# EAGLE board panelizado (EAGLE 6.5.0)
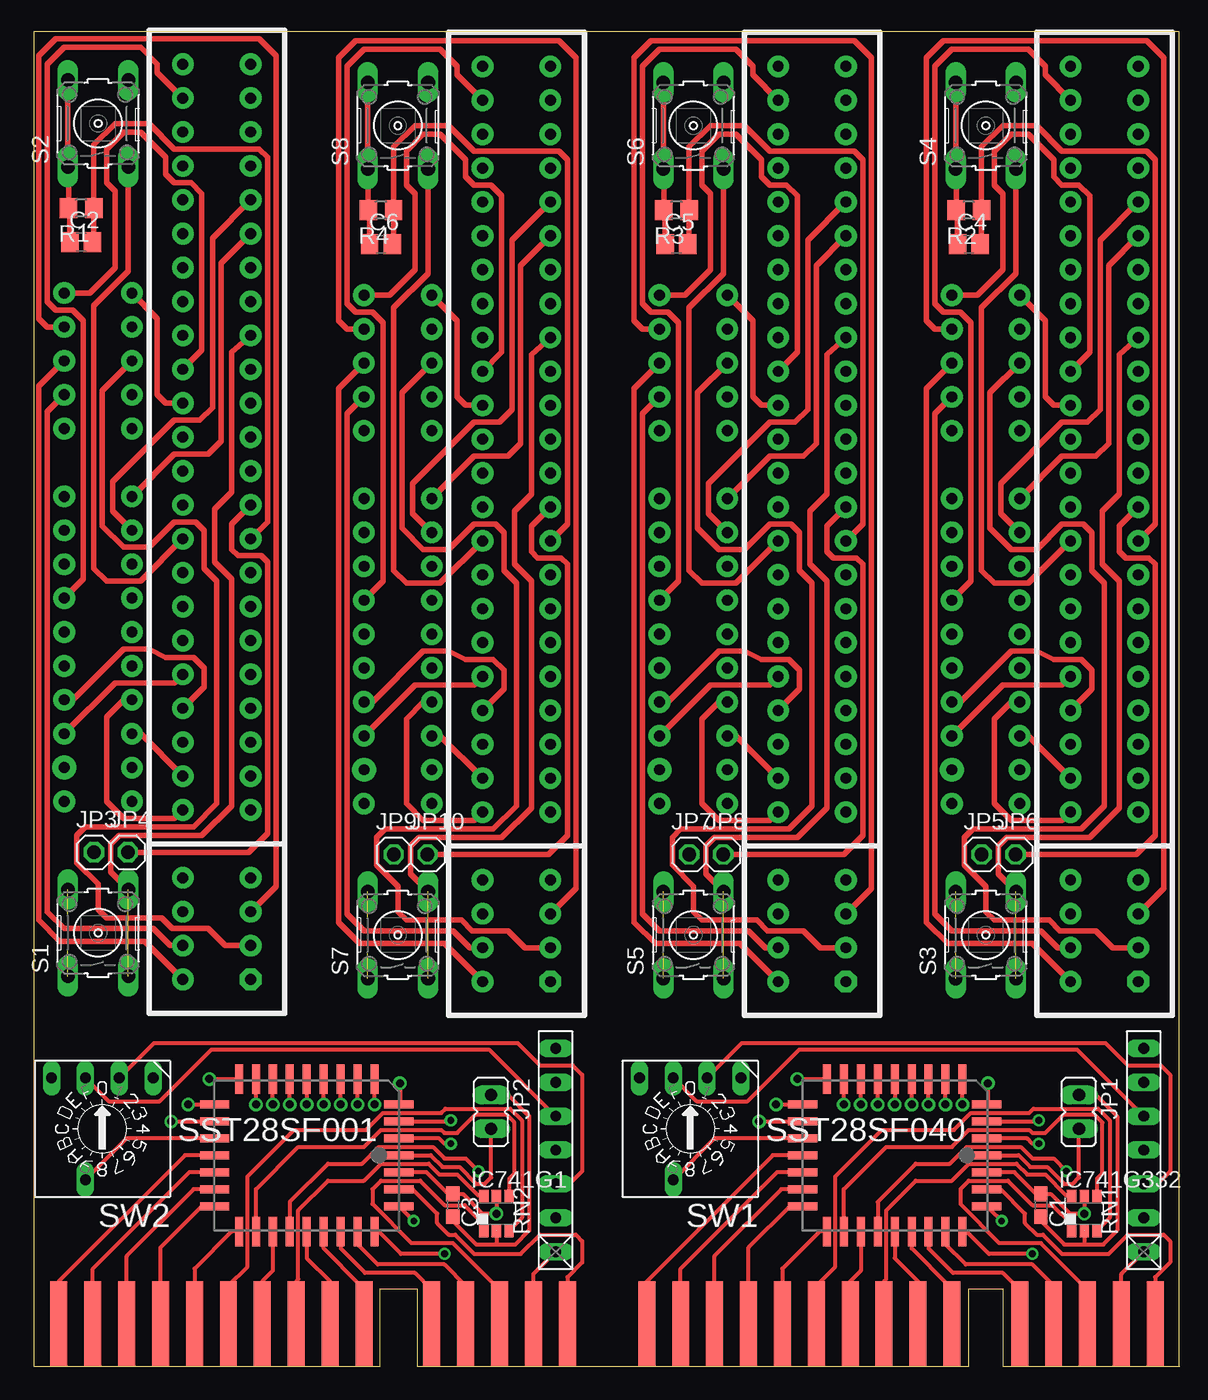
[diagram p0: board, top side]
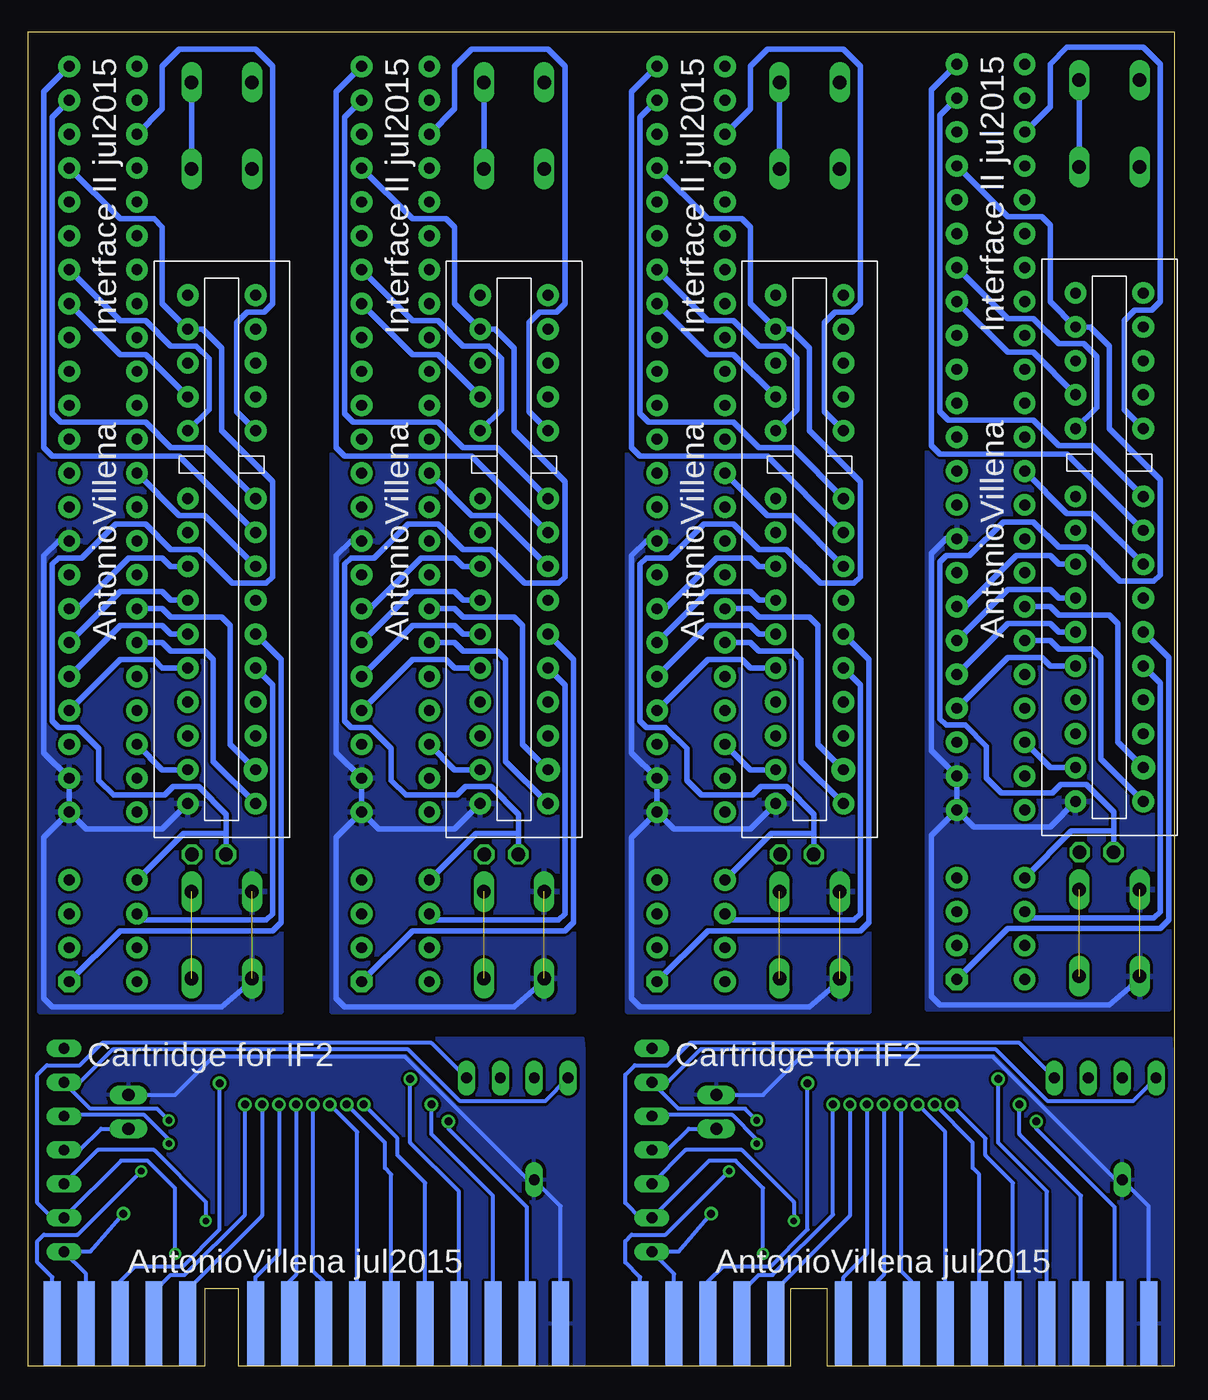
[diagram p1: board, bottom side, seen from below]

No outline drawn. Coordinates in mm, seen from the top.
Copper layers (1*16): Top 0.035mm / dielectric 1.5mm / Bottom 0.035mm
Design rules "default": minimum track width 10mil, minimum drill 24mil, track to track 8mil, track to pad 8mil, pad to pad 8mil, via to via 8mil, smd to smd 8mil, copper to edge 40mil, drill to drill 8mil, minimum pad ring 10mil, minimum via ring 8mil, stop-mask expansion 4mil, vias tented up to drill 0mil, thermal gap 10mil
Milling: 13 lines

## Footprints (pad centres in the part's own frame; a part is rotated, then mirrored left to right if it is on the bottom)
C0603 = smd 1.1 x 1: 1 -0.85,0; 2 0.85,0
C0805 = smd 1.3 x 1.5: 1 -0.85,0; 2 0.85,0
DBV_R-PDSO-G6 = smd 0.69 x 0.99: 1 -0.95,-1.29; 2 0,-1.29; 3 0.95,-1.29; 4 0.95,1.3; 5 0,1.3; 6 -0.95,1.3
JP1 = drill 0.914 long: 1 0,-1.27; 2 0,1.27
1X01 = drill 1.016 octagon: 1 0,0
R0805 = smd 1.3 x 1.5: 1 -0.95,0; 2 0.95,0
RN-7 = drill 0.813 long: 1 -7.62,0; 2 -5.08,0; 3 -2.54,0; 4 0,0; 5 2.54,0; 6 5.08,0; 7 7.62,0
B3F-10XX = drill 1.016 long: 1 -3.251,2.261; 2 3.251,2.261; 3 -3.251,-2.261; 4 3.251,-2.261
PLCC32R = smd 0.6 x 2.2: 1 0,6.9; 2 -1.27,6.9; 3 -2.54,6.9; 4 -3.81,6.9; 14 -3.81,-6.9; 15 -2.54,-6.9; 16 -1.27,-6.9; 17 0,-6.9; 18 1.27,-6.9; 19 2.54,-6.9; 20 3.81,-6.9; 30 3.81,6.9; 31 2.54,6.9; 32 1.27,6.9 | smd 2.2 x 0.6: 5 -5.7,5.08; 6 -5.7,3.81; 7 -5.7,2.54; 8 -5.7,1.27; 9 -5.7,0; 10 -5.7,-1.27; 11 -5.7,-2.54; 12 -5.7,-3.81; 13 -5.7,-5.08; 21 5.7,-5.08; 22 5.7,-3.81; 23 5.7,-2.54; 24 5.7,-1.27; 25 5.7,0; 26 5.7,1.27; 27 5.7,2.54; 28 5.7,3.81; 29 5.7,5.08
SW-C16 = drill 0.813 long: 1 -3.81,-3.81; 2 -1.27,-3.81; 4 1.27,-3.81; 8 3.81,-3.81; C 1.27,3.81
BUS_CARTUCHO_IF2 = smd 1.27 x 6.35 bottom: A0 -27.305,3.175; A1 -24.765,3.175; A2 -22.225,3.175; A3 -19.685,3.175; A4 -17.145,3.175; A5 -14.605,3.175; A6 -9.525,3.175; A7 -6.985,3.175; A12 -4.445,3.175; D0 -29.845,3.175; D1 -32.385,3.175; D2 -34.925,3.175; GND -37.465,3.175; RD 0.635,3.175; ROMCS -1.905,3.175 | smd 1.27 x 6.35: A8 -9.525,3.175; A9 -14.605,3.175; A10 -22.225,3.175; A11 -17.145,3.175; A13 -6.985,3.175; A14 -24.765,3.175; A15 -4.445,3.175; D3 -37.465,3.175; D4 -34.925,3.175; D5 -32.385,3.175; D6 -29.845,3.175; D7 -27.305,3.175; MREQ -19.685,3.175; VCC -1.905,3.175; WR 0.635,3.175
ZX_CARTRIDGE = drill 0.813 pad 1.626: +5V 17.78,-2.54; A0 -7.62,2.54; A1 -5.08,2.54; A2 -2.54,2.54; A3 0,2.54; A4 2.54,2.54; A5 5.08,2.54; A6 10.16,2.54; A7 12.7,2.54; A8 10.16,-2.54; A9 5.08,-2.54; A10 -2.54,-2.54; A11 2.54,-2.54; A12 15.24,2.54; A13 12.7,-2.54; A14 -5.08,-2.54; A15 15.24,-2.54; D0 -10.16,2.54; D1 -12.7,2.54; D2 -15.24,2.54; D3 -17.78,-2.54; D5 -12.7,-2.54; D6 -10.16,-2.54; D7 -7.62,-2.54; GND -17.78,2.54; MREQ 0,-2.54; RD 20.32,2.54; ROMCS 17.78,2.54; WR 20.32,-2.54 | drill 0.813 pad 1.788: D4 -15.24,-2.54
2X28_SPE = drill 0.813 pad 1.626 octagon: A1 0,-5.08 | drill 0.813 pad 1.626: A2 2.54,-5.08; A3 5.08,-5.08; A4 7.62,-5.08; A6 12.7,-5.08; A7 15.24,-5.08; A8 17.78,-5.08; A9 20.32,-5.08; A10 22.86,-5.08; A11 25.4,-5.08; A12 27.94,-5.08; A13 30.48,-5.08; A14 33.02,-5.08; A15 35.56,-5.08; A16 38.1,-5.08; A17 40.64,-5.08; A18 43.18,-5.08; A19 45.72,-5.08; A20 48.26,-5.08; A21 50.8,-5.08; A22 53.34,-5.08; A23 55.88,-5.08; A24 58.42,-5.08; A25 60.96,-5.08; A26 63.5,-5.08; A27 66.04,-5.08; A28 68.58,-5.08; B1 0,0; B2 2.54,0; B3 5.08,0; B4 7.62,0; B6 12.7,0; B7 15.24,0; B8 17.78,0; B9 20.32,0; B10 22.86,0; B11 25.4,0; B12 27.94,0; B13 30.48,0; B14 33.02,0; B15 35.56,0; B16 38.1,0; B17 40.64,0; B18 43.18,0; B19 45.72,0; B20 48.26,0; B21 50.8,0; B22 53.34,0; B23 55.88,0; B24 58.42,0; B25 60.96,0; B26 63.5,0; B27 66.04,0; B28 68.58,0

## Placement (x,y rotation side)
C1  [C0603]  75.49,12.06 270 top
C2  4.7uF  [C0805]  3.57,84.22 0 top
C3  [C0603]  31.43,12.06 270 top
C4  4.7uF  [C0805]  70.09,84.06 0 top
C5  4.7uF  [C0805]  48.18,84.06 0 top
C6  4.7uF  [C0805]  26.04,84.06 0 top
IC741G1  [DBV_R-PDSO-G6]  34.69,11.43 0 top
IC741G332  [DBV_R-PDSO-G6]  78.74,11.43 0 top
JP1  [JP1]  78.34,19.05 180 top
JP2  [JP1]  34.29,19.05 180 top
JP3  [1X01]  4.52,38.5 0 top
JP4  [1X01]  7.06,38.5 0 top
JP5  [1X01]  71.04,38.34 0 top
JP6  [1X01]  73.58,38.34 0 top
JP7  [1X01]  49.13,38.34 0 top
JP8  [1X01]  51.67,38.34 0 top
JP9  [1X01]  26.99,38.34 0 top
JP10  [1X01]  29.53,38.34 0 top
R1  1K  [R0805]  3.57,86.76 180 top
R2  1K  [R0805]  70.09,86.6 180 top
R3  1K  [R0805]  48.18,86.6 180 top
R4  1K  [R0805]  26.04,86.6 180 top
RN1  [RN-7]  83.19,16.19 90 top
RN2  [RN-7]  39.13,16.19 90 top
S1  [B3F-10XX]  4.84,32.46 90 top
S2  [B3F-10XX]  4.84,93.11 90 top
S3  [B3F-10XX]  71.36,32.31 90 top
S4  [B3F-10XX]  71.36,92.95 90 top
S5  [B3F-10XX]  49.45,32.31 90 top
S6  [B3F-10XX]  49.45,92.95 90 top
S7  [B3F-10XX]  27.3,32.31 90 top
S8  [B3F-10XX]  27.3,92.95 90 top
SST28SF001  [PLCC32R]  20.48,15.8 270 top
SST28SF040  [PLCC32R]  64.53,15.8 270 top
SW1  [SW-C16]  49.21,17.78 180 top
SW2  [SW-C16]  5.16,17.78 180 top
U$1  IF2BUS  [BUS_CARTUCHO_IF2]  83.42,0 0 top
U$2  ZX_CARTRIDGE  [ZX_CARTRIDGE]  4.84,60.09 90 bottom
U$3  [2X28_SPE]  11.19,28.97 90 top
U$4  IF2BUS  [BUS_CARTUCHO_IF2]  39.37,0 0 top
U$5  [2X28_SPE]  77.71,28.81 90 top
U$6  ZX_CARTRIDGE  [ZX_CARTRIDGE]  71.36,59.93 90 bottom
U$7  [2X28_SPE]  55.8,28.81 90 top
U$8  ZX_CARTRIDGE  [ZX_CARTRIDGE]  49.45,59.93 90 bottom
U$9  [2X28_SPE]  33.66,28.81 90 top
U$10  ZX_CARTRIDGE  [ZX_CARTRIDGE]  27.3,59.93 90 bottom

## Library data of the parts
C1 C3 R1-R4 = rcl
C2 C4-C6 = resistor
IC741G1 IC741G332 = 74xx-little-de
JP1 JP2 = jumper
JP3-JP10 = pinhead
RN1 RN2 = resistor-net; OC_FARNELL: unknown; OC_NEWARK: unknown
S1-S8 = switch-omron; MPN: B3F-1000; OC_FARNELL: 176432; OC_NEWARK: 36M3542
SST28SF001 SST28SF040 = memory
SW1 SW2 = special
U$1 U$4 = SPECTRUM
U$2 U$6 U$8 U$10 = 8Bit_Parts
U$3 U$5 U$7 U$9 = zx_edge

## Nets
9V: U$3.A4
9V1: U$5.A4
9V2: U$7.A4
9V3: U$9.A4
+12V: U$3.B22
+12V1: U$5.B22
+12V2: U$7.B22
+12V3: U$9.B22
-5V: U$3.B20
-5V1: U$5.B20
-5V2: U$7.B20
-5V3: U$9.B20
-12V: U$3.B23
-12V1: U$5.B23
-12V2: U$7.B23
-12V3: U$9.B23
A0: SST28SF040.12 U$1.A0
A1: SST28SF040.11 U$1.A1
A2: SST28SF040.10 U$1.A2
A3: SST28SF040.9 U$1.A3
A4: SST28SF040.8 U$1.A4
A5: SST28SF040.7 U$1.A5
A6: SST28SF040.6 U$1.A6
A7: SST28SF040.5 U$1.A7
A8: SST28SF040.27 U$1.A8
A9: SST28SF040.26 U$1.A9
A10: SST28SF040.23 U$1.A10
A11: SST28SF040.25 U$1.A11
A12: SST28SF040.4 U$1.A12
A13: SST28SF040.28 U$1.A13
A14: IC741G332.3 U$1.A14
A15: IC741G332.1 U$1.A15
A16: U$2.A14 U$3.A1
A17: U$2.A10 U$3.B27
A18: U$2.A11 U$3.A28
A19: U$2.A9 U$3.A27
A20: U$2.A8 U$3.B26
A21: U$2.A13 U$3.B2
A22: U$2.A15 U$3.B1
A23: U$2.A0 U$3.A9
A24: U$2.A1 U$3.A10
A25: U$2.A2 U$3.A11
A26: U$2.A3 U$3.A12
A27: U$2.A4 U$3.A24
A28: U$2.A5 U$3.A23
A29: U$2.A6 U$3.A22
A30: U$2.A7 U$3.A21
A31: U$2.A12 U$3.A2
A32: SST28SF001.12 U$4.A0
A33: IC741G1.3 U$4.A14
A34: IC741G1.1 U$4.A15
A35: SST28SF001.11 U$4.A1
A36: SST28SF001.10 U$4.A2
A37: SST28SF001.9 U$4.A3
A38: SST28SF001.8 U$4.A4
A39: SST28SF001.7 U$4.A5
A40: SST28SF001.6 U$4.A6
A41: SST28SF001.5 U$4.A7
A42: SST28SF001.27 U$4.A8
A43: SST28SF001.26 U$4.A9
A44: SST28SF001.23 U$4.A10
A45: SST28SF001.25 U$4.A11
A46: SST28SF001.4 U$4.A12
A47: SST28SF001.28 U$4.A13
A48: U$5.A1 U$6.A14
A49: U$5.B27 U$6.A10
A50: U$5.A28 U$6.A11
A51: U$5.A27 U$6.A9
A52: U$5.B26 U$6.A8
A53: U$5.B2 U$6.A13
A54: U$5.B1 U$6.A15
A55: U$5.A9 U$6.A0
A56: U$5.A10 U$6.A1
A57: U$5.A11 U$6.A2
A58: U$5.A12 U$6.A3
A59: U$5.A24 U$6.A4
A60: U$5.A23 U$6.A5
A61: U$5.A22 U$6.A6
A62: U$5.A21 U$6.A7
A63: U$5.A2 U$6.A12
A64: U$7.A1 U$8.A14
A65: U$7.B27 U$8.A10
A66: U$7.A28 U$8.A11
A67: U$7.A27 U$8.A9
A68: U$7.B26 U$8.A8
A69: U$7.B2 U$8.A13
A70: U$7.B1 U$8.A15
A71: U$7.A9 U$8.A0
A72: U$7.A10 U$8.A1
A73: U$7.A11 U$8.A2
A74: U$7.A12 U$8.A3
A75: U$7.A24 U$8.A4
A76: U$7.A23 U$8.A5
A77: U$7.A22 U$8.A6
A78: U$7.A21 U$8.A7
A79: U$7.A2 U$8.A12
A80: U$9.A1 U$10.A14
A81: U$9.B27 U$10.A10
A82: U$9.A28 U$10.A11
A83: U$9.A27 U$10.A9
A84: U$9.B26 U$10.A8
A85: U$9.B2 U$10.A13
A86: U$9.B1 U$10.A15
A87: U$9.A9 U$10.A0
A88: U$9.A10 U$10.A1
A89: U$9.A11 U$10.A2
A90: U$9.A12 U$10.A3
A91: U$9.A24 U$10.A4
A92: U$9.A23 U$10.A5
A93: U$9.A22 U$10.A6
A94: U$9.A21 U$10.A7
A95: U$9.A2 U$10.A12
CS: IC741G332.4 SST28SF040.22
CS1: IC741G1.4 SST28SF001.22
D0: SST28SF040.13 U$1.D0
D1: SST28SF040.14 U$1.D1
D2: SST28SF040.15 U$1.D2
D3: SST28SF040.17 U$1.D3
D4: SST28SF040.18 U$1.D4
D5: SST28SF040.19 U$1.D5
D6: SST28SF040.20 U$1.D6
D7: SST28SF040.21 U$1.D7
D8: U$2.D3 U$3.B11
D9: U$2.D4 U$3.B12
D10: U$2.D5 U$3.B10
D11: U$2.D6 U$3.B9
D12: U$2.D7 U$3.B3
D13: U$2.D2 U$3.B8
D14: U$2.D1 U$3.B7
D15: U$2.D0 U$3.B6
D16: SST28SF001.13 U$4.D0
D17: SST28SF001.14 U$4.D1
D18: SST28SF001.15 U$4.D2
D19: SST28SF001.17 U$4.D3
D20: SST28SF001.18 U$4.D4
D21: SST28SF001.19 U$4.D5
D22: SST28SF001.20 U$4.D6
D23: SST28SF001.21 U$4.D7
D24: U$5.B11 U$6.D3
D25: U$5.B12 U$6.D4
D26: U$5.B10 U$6.D5
D27: U$5.B9 U$6.D6
D28: U$5.B3 U$6.D7
D29: U$5.B8 U$6.D2
D30: U$5.B7 U$6.D1
D31: U$5.B6 U$6.D0
D32: U$7.B11 U$8.D3
D33: U$7.B12 U$8.D4
D34: U$7.B10 U$8.D5
D35: U$7.B9 U$8.D6
D36: U$7.B3 U$8.D7
D37: U$7.B8 U$8.D2
D38: U$7.B7 U$8.D1
D39: U$7.B6 U$8.D0
D40: U$9.B11 U$10.D3
D41: U$9.B12 U$10.D4
D42: U$9.B10 U$10.D5
D43: U$9.B9 U$10.D6
D44: U$9.B3 U$10.D7
D45: U$9.B8 U$10.D2
D46: U$9.B7 U$10.D1
D47: U$9.B6 U$10.D0
GND: C1.2 IC741G332.2 JP1.1 SST28SF040.16 SW1.C U$1.GND
GND1: C2.2 R1.1 S1.1 S1.2 U$2.GND U$3.A6 U$3.A7 U$3.A14
GND2: C3.2 IC741G1.2 JP2.1 SST28SF001.16 SW2.C U$4.GND
GND3: C4.2 R2.1 S3.1 S3.2 U$5.A6 U$5.A7 U$5.A14 U$6.GND
GND4: C5.2 R3.1 S5.1 S5.2 U$7.A6 U$7.A7 U$7.A14 U$8.GND
GND5: C6.2 R4.1 S7.1 S7.2 U$9.A6 U$9.A7 U$9.A14 U$10.GND
MREQ: IC741G332.6 U$1.MREQ
MREQ1: U$2.MREQ U$3.B16
MREQ2: IC741G1.6 U$4.MREQ
MREQ3: U$5.B16 U$6.MREQ
MREQ4: U$7.B16 U$8.MREQ
MREQ5: U$9.B16 U$10.MREQ
N$1: C2.1 R1.2 S2.1 S2.2
N$2: JP1.2 RN1.4 SST28SF040.1
N$3: RN1.3 SST28SF040.30 SW1.2
N$4: RN1.5 SST28SF040.2 SW1.4
N$5: RN1.6 SST28SF040.3 SW1.8
N$6: RN1.2 SST28SF040.29 SW1.1
N$7: JP2.2 RN2.4 SST28SF001.1
N$8: RN2.3 SST28SF001.30 SW2.2
N$9: RN2.5 SST28SF001.2 SW2.4
N$10: RN2.6 SST28SF001.3 SW2.8
N$11: RN2.2 SST28SF001.29 SW2.1
N$12: JP4.1 U$3.A15
N$13: C4.1 R2.2 S4.1 S4.2
N$14: JP6.1 U$5.A15
N$15: C5.1 R3.2 S6.1 S6.2
N$16: JP8.1 U$7.A15
N$17: C6.1 R4.2 S8.1 S8.2
N$18: JP10.1 U$9.A15
NMI: S2.3 S2.4 U$3.B14
NMI1: S4.3 S4.4 U$5.B14
NMI2: S6.3 S6.4 U$7.B14
NMI3: S8.3 S8.4 U$9.B14
RD: SST28SF040.24 U$1.RD
RD1: U$2.RD U$3.B18
RD2: SST28SF001.24 U$4.RD
RD3: U$5.B18 U$6.RD
RD4: U$7.B18 U$8.RD
RD5: U$9.B18 U$10.RD
RESET: S1.3 S1.4 U$3.A20
RESET1: S3.3 S3.4 U$5.A20
RESET2: S5.3 S5.4 U$7.A20
RESET3: S7.3 S7.4 U$9.A20
ROMCS: JP3.1 U$2.ROMCS U$3.A25 U$3.B4
ROMCS1: JP5.1 U$5.A25 U$5.B4 U$6.ROMCS
ROMCS2: JP7.1 U$7.A25 U$7.B4 U$8.ROMCS
ROMCS3: JP9.1 U$9.A25 U$9.B4 U$10.ROMCS
VCC: C1.1 IC741G332.5 RN1.1 SST28SF040.32 U$1.ROMCS U$1.VCC
VCC1: U$2.+5V U$3.A3
VCC2: C3.1 IC741G1.5 RN2.1 SST28SF001.32 U$4.ROMCS U$4.VCC
VCC3: U$5.A3 U$6.+5V
VCC4: U$7.A3 U$8.+5V
VCC5: U$9.A3 U$10.+5V
WR: SST28SF040.31 U$1.WR
WR1: U$2.WR U$3.B19
WR2: SST28SF001.31 U$4.WR
WR3: U$5.B19 U$6.WR
WR4: U$7.B19 U$8.WR
WR5: U$9.B19 U$10.WR

## Tracks (layer width: path | path; a pad name or v marks a point on that pad's centre or on a via)
A0  (via drill 0.6)
  Top 0.305: v60.72,19.61 SST28SF040.12
  Bottom 0.305: v60.72,19.61 58.18,17.07 58.18,15.8 56.12,13.73 U$1.A0
A1  (via drill 0.6)
  Top 0.305: v61.99,19.61 SST28SF040.11
  Bottom 0.305: v61.99,19.61 59.13,16.75 59.13,14.84 58.66,14.37 U$1.A1
A2  (via drill 0.6)
  Top 0.305: v63.26,19.61 SST28SF040.10
  Bottom 0.305: U$1.A2 61.2,17.54 v63.26,19.61
A3  (via drill 0.6)
  Top 0.305: SST28SF040.9 v64.53,19.61
  Bottom 0.305: v64.53,19.61 64.53,7.14 63.74,6.35 U$1.A3
A4  (via drill 0.6)
  Top 0.305: v65.8,19.61 SST28SF040.8
  Bottom 0.305: U$1.A4 66.28,6.35 65.8,6.83 v65.8,19.61
A5  (via drill 0.6)
  Top 0.305: v67.07,19.61 SST28SF040.7
  Bottom 0.305: U$1.A5 68.82,6.67 67.07,8.41 v67.07,19.61
A6  (via drill 0.6)
  Top 0.305: v68.34,19.61 SST28SF040.6
  Bottom 0.305: U$1.A6 73.9,5.71 68.34,11.27 v68.34,19.61
A7  (via drill 0.6)
  Top 0.305: v69.61,19.61 SST28SF040.5
  Bottom 0.305: U$1.A7 76.44,5.56 75.17,6.83 74.14,6.83 69.61,11.35 v69.61,19.61
A8
  Top 0.305: SST28SF040.27 67.07,8.81 68.9,6.99 72.63,6.99 73.9,5.71 U$1.A8
A9
  Top 0.305: U$1.A9 68.82,6.03 68.58,6.03 65.8,8.81 SST28SF040.26
A10
  Top 0.305: SST28SF040.23 61.99,7.14 61.2,6.35 U$1.A10
A11
  Top 0.305: U$1.A11 66.28,6.35 64.53,8.1 SST28SF040.25
A12  (via drill 0.6)
  Top 0.305: v71.52,21.19 71.52,19.69 SST28SF040.4
  Bottom 0.305: v71.52,21.19 71.52,10.24 74.3,7.46 77.87,7.46 78.98,6.35 U$1.A12
A13
  Top 0.305: SST28SF040.28 68.34,9.13 69.85,7.62 74.85,7.62 76.44,6.03 U$1.A13
A14
  Top 0.305: U$1.A14 58.66,6.03 60.09,7.46 60.09,14.21 63.58,17.7 68.98,17.7 70.25,18.97 74.61,18.97 74.93,19.29 79.77,19.29 80.64,18.41 80.64,11.1 IC741G332.3
A15
  Top 0.305: 77.79,10.32 IC741G332.1 77.79,10.64 76.36,12.06 74.85,12.06 73.03,13.89 70.09,13.89 69.45,13.26 69.45,12.14 72.39,9.21 75.49,9.21 78.98,5.71 U$1.A15
A16
  Bottom 0.406: U$2.A14 0.4,53.1 0.4,33.42 1.03,32.78 12.46,32.78 U$3.A1
A17
  Top 0.406: U$2.A10 3.73,58.98 3.73,78.34 2.94,79.14 1.67,79.14 1.03,79.77 1.03,97.55 2.3,98.82 8.02,98.82 9.29,97.55 9.29,96.92 U$3.B27
A18
  Bottom 0.406: U$2.A11 8.02,68.34 17.54,68.34 18.18,68.98 18.18,95.65 U$3.A28
A19
  Bottom 0.406: U$2.A9 6.11,68.98 8.65,68.98 10.56,70.88 16.91,70.88 17.54,71.52 17.54,93.74 U$3.A27
A20
  Bottom 0.406: U$2.A8 3.73,71.68 3.73,78.34 2.94,79.14 1.67,79.14 1.03,79.77 1.03,97.55 2.3,98.82 8.02,98.82 9.29,97.55 9.29,94.38 U$3.B26
A21
  Top 0.406: U$2.A13 1.03,71.52 1.03,34.05 2.3,32.78 8.97,32.78 10.24,31.51 U$3.B2
A22
  Top 0.406: U$2.A15 0.4,73.42 0.4,33.42 1.98,31.83 8.33,31.83 U$3.B1
A23
  Bottom 0.406: U$3.A9 12.46,53.1 9.92,53.1 9.29,52.47 U$2.A0
A24
  Bottom 0.406: U$3.A10 12.46,55.64 9.29,55.64 8.65,55.01 U$2.A1
A25
  Bottom 0.406: U$3.A11 12.46,58.18 9.29,58.18 8.65,57.55 U$2.A2
A26
  Bottom 0.406: U$2.A3 8.65,60.09 9.29,60.72 11.83,60.72 15.64,56.91 U$3.A12
A27
  Top 0.406: U$2.A4 5.95,64.06 5.95,66.28 10.56,70.88 12.46,70.88 13.41,71.83 13.41,84.53 U$3.A24
A28
  Top 0.406: U$3.A23 14.05,82.63 14.05,69.29 13.1,68.34 10.56,68.34 U$2.A5
A29
  Bottom 0.406: U$2.A6 5.79,71.83 5.79,75.64 6.75,76.6 8.65,76.6 10.56,78.5 12.46,78.5 U$3.A22
A30
  Bottom 0.406: U$2.A7 10.56,75.96 12.46,75.96 U$3.A21
A31
  Top 0.406: U$2.A12 5.16,73.1 5.16,62.94 6.75,61.36 8.65,61.36 10.56,63.26 12.14,63.26 12.78,62.63 12.78,59.77 13.73,58.82 13.73,42.15 11.99,40.4 3.89,40.4 3.25,39.77 3.25,37.7 4.84,36.12 4.84,34.21 5.48,33.58 9.6,33.58 10.4,32.78 13.1,32.78 14.37,31.51 U$3.A2
A32  (via drill 0.6)
  Top 0.305: v16.67,19.61 SST28SF001.12
  Bottom 0.305: v16.67,19.61 14.13,17.07 14.13,15.8 12.06,13.73 U$4.A0
A33
  Top 0.305: U$4.A14 14.61,6.03 16.03,7.46 16.03,14.21 19.53,17.7 24.92,17.7 26.19,18.97 30.56,18.97 30.88,19.29 35.72,19.29 36.59,18.41 36.59,11.1 IC741G1.3
A34
  Top 0.305: 33.74,10.32 IC741G1.1 33.73,10.64 32.31,12.06 30.8,12.06 28.97,13.89 26.04,13.89 25.4,13.26 25.4,12.14 28.34,9.21 31.43,9.21 34.92,5.71 U$4.A15
A35  (via drill 0.6)
  Top 0.305: v17.94,19.61 SST28SF001.11
  Bottom 0.305: v17.94,19.61 15.08,16.75 15.08,14.84 14.61,14.37 U$4.A1
A36  (via drill 0.6)
  Top 0.305: v19.21,19.61 SST28SF001.10
  Bottom 0.305: U$4.A2 17.14,17.54 v19.21,19.61
A37  (via drill 0.6)
  Top 0.305: SST28SF001.9 v20.48,19.61
  Bottom 0.305: v20.48,19.61 20.48,7.14 19.68,6.35 U$4.A3
A38  (via drill 0.6)
  Top 0.305: v21.75,19.61 SST28SF001.8
  Bottom 0.305: U$4.A4 22.23,6.35 21.75,6.83 v21.75,19.61
A39  (via drill 0.6)
  Top 0.305: v23.02,19.61 SST28SF001.7
  Bottom 0.305: U$4.A5 24.77,6.67 23.02,8.41 v23.02,19.61
A40  (via drill 0.6)
  Top 0.305: v24.29,19.61 SST28SF001.6
  Bottom 0.305: U$4.A6 29.84,5.71 24.29,11.27 v24.29,19.61
A41  (via drill 0.6)
  Top 0.305: v25.56,19.61 SST28SF001.5
  Bottom 0.305: U$4.A7 32.38,5.56 31.11,6.83 30.08,6.83 25.56,11.35 v25.56,19.61
A42
  Top 0.305: SST28SF001.27 23.02,8.81 24.84,6.99 28.57,6.99 29.84,5.71 U$4.A8
A43
  Top 0.305: U$4.A9 24.77,6.03 24.53,6.03 21.75,8.81 SST28SF001.26
A44
  Top 0.305: SST28SF001.23 17.94,7.14 17.14,6.35 U$4.A10
A45
  Top 0.305: U$4.A11 22.23,6.35 20.48,8.1 SST28SF001.25
A46  (via drill 0.6)
  Top 0.305: v27.46,21.19 27.46,19.69 SST28SF001.4
  Bottom 0.305: v27.46,21.19 27.46,10.24 30.24,7.46 33.81,7.46 34.92,6.35 U$4.A12
A47
  Top 0.305: SST28SF001.28 24.29,9.13 25.8,7.62 30.8,7.62 32.38,6.03 U$4.A13
A48
  Bottom 0.406: U$6.A14 66.91,52.94 66.91,33.26 67.55,32.62 78.98,32.62 U$5.A1
A49
  Top 0.406: U$6.A10 70.25,58.82 70.25,78.18 69.45,78.98 68.18,78.98 67.55,79.61 67.55,97.39 68.82,98.66 74.53,98.66 75.8,97.39 75.8,96.76 U$5.B27
A50
  Bottom 0.406: U$6.A11 74.53,68.18 84.06,68.18 84.69,68.82 84.69,95.49 U$5.A28
A51
  Bottom 0.406: U$6.A9 72.63,68.82 75.17,68.82 77.07,70.72 83.42,70.72 84.06,71.36 84.06,93.58 U$5.A27
A52
  Bottom 0.406: U$6.A8 70.25,71.52 70.25,78.18 69.45,78.98 68.18,78.98 67.55,79.61 67.55,97.39 68.82,98.66 74.53,98.66 75.8,97.39 75.8,94.22 U$5.B26
A53
  Top 0.406: U$6.A13 67.55,71.36 67.55,33.89 68.82,32.62 75.49,32.62 76.76,31.35 U$5.B2
A54
  Top 0.406: U$6.A15 66.91,73.26 66.91,33.26 68.5,31.67 74.85,31.67 U$5.B1
A55
  Bottom 0.406: U$5.A9 78.98,52.94 76.44,52.94 75.8,52.31 U$6.A0
A56
  Bottom 0.406: U$5.A10 78.98,55.48 75.8,55.48 75.17,54.85 U$6.A1
A57
  Bottom 0.406: U$5.A11 78.98,58.02 75.8,58.02 75.17,57.39 U$6.A2
A58
  Bottom 0.406: U$6.A3 75.17,59.93 75.8,60.56 78.34,60.56 82.15,56.75 U$5.A12
A59
  Top 0.406: U$6.A4 72.47,63.9 72.47,66.12 77.07,70.72 78.98,70.72 79.93,71.68 79.93,84.38 U$5.A24
A60
  Top 0.406: U$5.A23 80.57,82.47 80.57,69.14 79.61,68.18 77.07,68.18 U$6.A5
A61
  Bottom 0.406: U$6.A6 72.31,71.68 72.31,75.49 73.26,76.44 75.17,76.44 77.07,78.34 78.98,78.34 U$5.A22
A62
  Bottom 0.406: U$6.A7 77.07,75.8 78.98,75.8 U$5.A21
A63
  Top 0.406: U$6.A12 71.68,72.95 71.68,62.79 73.26,61.2 75.17,61.2 77.07,63.1 78.66,63.1 79.3,62.47 79.3,59.61 80.25,58.66 80.25,41.99 78.5,40.24 70.41,40.24 69.77,39.61 69.77,37.54 71.36,35.96 71.36,34.05 71.99,33.42 76.12,33.42 76.91,32.62 79.61,32.62 80.88,31.35 U$5.A2
A64
  Bottom 0.406: U$8.A14 45.01,52.94 45.01,33.26 45.64,32.62 57.07,32.62 U$7.A1
A65
  Top 0.406: U$8.A10 48.34,58.82 48.34,78.18 47.55,78.98 46.28,78.98 45.64,79.61 45.64,97.39 46.91,98.66 52.63,98.66 53.9,97.39 53.9,96.76 U$7.B27
A66
  Bottom 0.406: U$8.A11 52.63,68.18 62.15,68.18 62.79,68.82 62.79,95.49 U$7.A28
A67
  Bottom 0.406: U$8.A9 50.72,68.82 53.26,68.82 55.17,70.72 61.52,70.72 62.15,71.36 62.15,93.58 U$7.A27
A68
  Bottom 0.406: U$8.A8 48.34,71.52 48.34,78.18 47.55,78.98 46.28,78.98 45.64,79.61 45.64,97.39 46.91,98.66 52.63,98.66 53.9,97.39 53.9,94.22 U$7.B26
A69
  Top 0.406: U$8.A13 45.64,71.36 45.64,33.89 46.91,32.62 53.58,32.62 54.85,31.35 U$7.B2
A70
  Top 0.406: U$8.A15 45.01,73.26 45.01,33.26 46.59,31.67 52.94,31.67 U$7.B1
A71
  Bottom 0.406: U$7.A9 57.07,52.94 54.53,52.94 53.9,52.31 U$8.A0
A72
  Bottom 0.406: U$7.A10 57.07,55.48 53.9,55.48 53.26,54.85 U$8.A1
A73
  Bottom 0.406: U$7.A11 57.07,58.02 53.9,58.02 53.26,57.39 U$8.A2
A74
  Bottom 0.406: U$8.A3 53.26,59.93 53.9,60.56 56.44,60.56 60.25,56.75 U$7.A12
A75
  Top 0.406: U$8.A4 50.56,63.9 50.56,66.12 55.17,70.72 57.07,70.72 58.02,71.68 58.02,84.38 U$7.A24
A76
  Top 0.406: U$7.A23 58.66,82.47 58.66,69.14 57.71,68.18 55.17,68.18 U$8.A5
A77
  Bottom 0.406: U$8.A6 50.4,71.68 50.4,75.49 51.36,76.44 53.26,76.44 55.17,78.34 57.07,78.34 U$7.A22
A78
  Bottom 0.406: U$8.A7 55.17,75.8 57.07,75.8 U$7.A21
A79
  Top 0.406: U$8.A12 49.77,72.95 49.77,62.79 51.36,61.2 53.26,61.2 55.17,63.1 56.75,63.1 57.39,62.47 57.39,59.61 58.34,58.66 58.34,41.99 56.59,40.24 48.5,40.24 47.86,39.61 47.86,37.54 49.45,35.96 49.45,34.05 50.09,33.42 54.21,33.42 55.01,32.62 57.71,32.62 58.98,31.35 U$7.A2
A80
  Bottom 0.406: U$10.A14 22.86,52.94 22.86,33.26 23.5,32.62 34.92,32.62 U$9.A1
A81
  Top 0.406: U$10.A10 26.19,58.82 26.19,78.18 25.4,78.98 24.13,78.98 23.5,79.61 23.5,97.39 24.77,98.66 30.48,98.66 31.75,97.39 31.75,96.76 U$9.B27
A82
  Bottom 0.406: U$10.A11 30.48,68.18 40.01,68.18 40.64,68.82 40.64,95.49 U$9.A28
A83
  Bottom 0.406: U$10.A9 28.57,68.82 31.11,68.82 33.02,70.72 39.37,70.72 40.01,71.36 40.01,93.58 U$9.A27
A84
  Bottom 0.406: U$10.A8 26.19,71.52 26.19,78.18 25.4,78.98 24.13,78.98 23.5,79.61 23.5,97.39 24.77,98.66 30.48,98.66 31.75,97.39 31.75,94.22 U$9.B26
A85
  Top 0.406: U$10.A13 23.5,71.36 23.5,33.89 24.77,32.62 31.43,32.62 32.7,31.35 U$9.B2
A86
  Top 0.406: U$10.A15 22.86,73.26 22.86,33.26 24.45,31.67 30.8,31.67 U$9.B1
A87
  Bottom 0.406: U$9.A9 34.92,52.94 32.38,52.94 31.75,52.31 U$10.A0
A88
  Bottom 0.406: U$9.A10 34.92,55.48 31.75,55.48 31.11,54.85 U$10.A1
A89
  Bottom 0.406: U$9.A11 34.92,58.02 31.75,58.02 31.11,57.39 U$10.A2
A90
  Bottom 0.406: U$10.A3 31.11,59.93 31.75,60.56 34.29,60.56 38.1,56.75 U$9.A12
A91
  Top 0.406: U$10.A4 28.42,63.9 28.42,66.12 33.02,70.72 34.92,70.72 35.88,71.68 35.88,84.38 U$9.A24
A92
  Top 0.406: U$9.A23 36.51,82.47 36.51,69.14 35.56,68.18 33.02,68.18 U$10.A5
A93
  Bottom 0.406: U$10.A6 28.26,71.68 28.26,75.49 29.21,76.44 31.11,76.44 33.02,78.34 34.92,78.34 U$9.A22
A94
  Bottom 0.406: U$10.A7 33.02,75.8 34.92,75.8 U$9.A21
A95
  Top 0.406: U$10.A12 27.62,72.95 27.62,62.79 29.21,61.2 31.11,61.2 33.02,63.1 34.61,63.1 35.24,62.47 35.24,59.61 36.2,58.66 36.2,41.99 34.45,40.24 26.35,40.24 25.72,39.61 25.72,37.54 27.3,35.96 27.3,34.05 27.94,33.42 32.07,33.42 32.86,32.62 35.56,32.62 36.83,31.35 U$9.A2
CS
  Top 0.305: SST28SF040.22 60.72,13.26 63.9,16.43 68.82,16.43 70.09,17.7 74.61,17.7 74.85,17.46 75.8,17.46 77.15,18.81 79.53,18.81 80.09,18.26 80.09,14.45 79.69,14.05 IC741G332.4
CS1
  Top 0.305: SST28SF001.22 16.67,13.26 19.84,16.43 24.77,16.43 26.04,17.7 30.56,17.7 30.8,17.46 31.75,17.46 33.1,18.81 35.48,18.81 36.04,18.26 36.04,14.45 35.64,14.05 IC741G1.4
D0  (via drill 0.6)
  Top 0.305: v57.23,21.51 59.44,21.51 SST28SF040.13
  Bottom 0.305: U$1.D0 53.58,13.1 57.23,16.75 v57.23,21.51
D1  (via drill 0.6)
  Top 0.305: v55.64,19.61 SST28SF040.14
  Bottom 0.305: U$1.D1 51.04,12.78 55.64,17.38 v55.64,19.61
D2  (via drill 0.6)
  Top 0.305: v54.37,18.34 SST28SF040.15
  Bottom 0.305: U$1.D2 48.5,11.91 54.37,17.78 v54.37,18.34
D3
  Top 0.305: U$1.D3 45.96,6.35 55.4,15.8 SST28SF040.17
D4
  Top 0.305: U$1.D4 48.5,7.3 55.72,14.53 SST28SF040.18
D5
  Top 0.305: U$1.D5 51.04,8.26 56.04,13.26 SST28SF040.19
D6
  Top 0.305: U$1.D6 53.58,8.89 56.67,11.99 SST28SF040.20
D7
  Top 0.305: U$1.D7 56.12,7.3 58.91,10.1 SST28SF040.21
D8
  Bottom 0.406: U$2.D3 5.48,45.48 5.48,53.1 6.11,53.74 8.65,53.74 9.29,54.37 U$3.B11
D9
  Bottom 0.406: U$2.D4 4.21,46.75 4.21,55.64 4.84,56.28 8.65,56.28 9.29,56.91 U$3.B12
D10
  Top 0.406: U$2.D5 6.11,51.2 10.56,51.2 U$3.B10
D11
  Top 0.406: U$2.D6 2.94,49.93 6.75,53.74 8.65,53.74 9.92,53.1 11.99,53.1 12.78,52.31 12.78,50.88 U$3.B9
D12
  Bottom 0.406: U$2.D7 1.03,51.2 1.03,34.05 1.51,33.58 10.72,33.58 U$3.B3
D13
  Bottom 0.406: U$2.D2 9.29,44.85 U$3.B8
D14
  Top 0.406: U$2.D1 8.02,47.39 U$3.B7
D15
  Top 0.406: U$2.D0 6.75,49.93 5.48,48.66 5.48,42.31 6.75,41.04 10.56,41.04 U$3.B6
D16  (via drill 0.6)
  Top 0.305: v13.18,21.51 15.38,21.51 SST28SF001.13
  Bottom 0.305: U$4.D0 9.53,13.1 13.18,16.75 v13.18,21.51
D17  (via drill 0.6)
  Top 0.305: v11.59,19.61 SST28SF001.14
  Bottom 0.305: U$4.D1 6.99,12.78 11.59,17.38 v11.59,19.61
D18  (via drill 0.6)
  Top 0.305: v10.32,18.34 SST28SF001.15
  Bottom 0.305: U$4.D2 4.45,11.91 10.32,17.78 v10.32,18.34
D19
  Top 0.305: U$4.D3 1.91,6.35 11.35,15.8 SST28SF001.17
D20
  Top 0.305: U$4.D4 4.45,7.3 11.67,14.53 SST28SF001.18
D21
  Top 0.305: U$4.D5 6.99,8.26 11.99,13.26 SST28SF001.19
D22
  Top 0.305: U$4.D6 9.53,8.89 12.62,11.99 SST28SF001.20
D23
  Top 0.305: U$4.D7 12.06,7.3 14.86,10.1 SST28SF001.21
D24
  Bottom 0.406: U$6.D3 71.99,45.32 71.99,52.94 72.63,53.58 75.17,53.58 75.8,54.21 U$5.B11
D25
  Bottom 0.406: U$6.D4 70.72,46.59 70.72,55.48 71.36,56.12 75.17,56.12 75.8,56.75 U$5.B12
D26
  Top 0.406: U$6.D5 72.63,51.04 77.07,51.04 U$5.B10
D27
  Top 0.406: U$6.D6 69.45,49.77 73.26,53.58 75.17,53.58 76.44,52.94 78.5,52.94 79.3,52.15 79.3,50.72 U$5.B9
D28
  Bottom 0.406: U$6.D7 67.55,51.04 67.55,33.89 68.02,33.42 77.23,33.42 U$5.B3
D29
  Bottom 0.406: U$6.D2 75.8,44.69 U$5.B8
D30
  Top 0.406: U$6.D1 74.53,47.23 U$5.B7
D31
  Top 0.406: U$6.D0 73.26,49.77 71.99,48.5 71.99,42.15 73.26,40.88 77.07,40.88 U$5.B6
D32
  Bottom 0.406: U$8.D3 50.09,45.32 50.09,52.94 50.72,53.58 53.26,53.58 53.9,54.21 U$7.B11
D33
  Bottom 0.406: U$8.D4 48.82,46.59 48.82,55.48 49.45,56.12 53.26,56.12 53.9,56.75 U$7.B12
D34
  Top 0.406: U$8.D5 50.72,51.04 55.17,51.04 U$7.B10
D35
  Top 0.406: U$8.D6 47.55,49.77 51.36,53.58 53.26,53.58 54.53,52.94 56.59,52.94 57.39,52.15 57.39,50.72 U$7.B9
D36
  Bottom 0.406: U$8.D7 45.64,51.04 45.64,33.89 46.12,33.42 55.32,33.42 U$7.B3
D37
  Bottom 0.406: U$8.D2 53.9,44.69 U$7.B8
D38
  Top 0.406: U$8.D1 52.63,47.23 U$7.B7
D39
  Top 0.406: U$8.D0 51.36,49.77 50.09,48.5 50.09,42.15 51.36,40.88 55.17,40.88 U$7.B6
D40
  Bottom 0.406: U$10.D3 27.94,45.32 27.94,52.94 28.57,53.58 31.11,53.58 31.75,54.21 U$9.B11
D41
  Bottom 0.406: U$10.D4 26.67,46.59 26.67,55.48 27.3,56.12 31.11,56.12 31.75,56.75 U$9.B12
D42
  Top 0.406: U$10.D5 28.57,51.04 33.02,51.04 U$9.B10
D43
  Top 0.406: U$10.D6 25.4,49.77 29.21,53.58 31.11,53.58 32.38,52.94 34.45,52.94 35.24,52.15 35.24,50.72 U$9.B9
D44
  Bottom 0.406: U$10.D7 23.5,51.04 23.5,33.89 23.97,33.42 33.18,33.42 U$9.B3
D45
  Bottom 0.406: U$10.D2 31.75,44.69 U$9.B8
D46
  Top 0.406: U$10.D1 30.48,47.23 U$9.B7
D47
  Top 0.406: U$10.D0 29.21,49.77 27.94,48.5 27.94,42.15 29.21,40.88 33.02,40.88 U$9.B6
GND
  Top 0.305: JP1.1 79.61,20.32 81.2,18.73 81.2,10.16 80.17,9.13 78.74,9.13 | C1.2 75.54,11.21 75.54,10.82 77.23,9.13 78.74,9.13 | IC741G332.2 78.74,9.13 | SW1.C 51.04,17.07 SST28SF040.16
  Bottom 0.305: U$1.GND 45.96,11.99 SW1.C 48.42,13.97 57.63,23.18 71.99,23.18 74.85,20.32 JP1.1
  pour Bottom: 44.29,24.53 85.72,24.53 85.72,0.16 44.21,0.16 44.21,23.65
GND1  (1 unrouted)
  Top 0.406: C2.2 4.52,84.32 R1.1 4.52,91.52 6.11,93.11 8.65,93.11 10.56,91.2 16.91,91.2 17.54,90.57 17.54,63.26 U$3.A14
  Bottom 0.406: S1.1 2.58,29.01 4.84,27.07 17.54,27.07 18.18,27.7 18.18,39.77 U$3.A6 | U$3.A6 U$3.A7 18.18,46.12 18.18,60.88 17.07,61.99 U$3.A14 | U$2.GND 9.29,40.4 15,40.4 U$3.A6
  pour Bottom: 0.4,26.75 0.4,99.77 18.49,99.77 18.49,26.75
GND2
  Top 0.305: JP2.1 35.56,20.32 37.15,18.73 37.15,10.16 36.12,9.13 34.69,9.13 | C3.2 31.49,11.21 31.49,10.82 33.18,9.13 34.69,9.13 | IC741G1.2 34.69,9.13 | SW2.C 6.99,17.07 SST28SF001.16
  Bottom 0.305: U$4.GND 1.91,11.99 SW2.C 4.37,13.97 13.57,23.18 27.94,23.18 30.8,20.32 JP2.1
  pour Bottom: 0.24,24.53 41.67,24.53 41.67,0.16 0.16,0.16 0.16,23.65
GND3  (1 unrouted)
  Top 0.406: C4.2 71.04,84.16 R2.1 71.04,91.36 72.63,92.95 75.17,92.95 77.07,91.04 83.42,91.04 84.06,90.41 84.06,63.1 U$5.A14
  Bottom 0.406: S3.1 69.1,28.85 71.36,26.91 84.06,26.91 84.69,27.54 84.69,39.61 U$5.A6 | U$5.A6 U$5.A7 84.69,45.96 84.69,60.72 83.58,61.83 U$5.A14 | U$6.GND 75.8,40.24 81.52,40.24 U$5.A6
  pour Bottom: 66.91,26.59 66.91,99.62 85.01,99.62 85.01,26.59
GND4  (1 unrouted)
  Top 0.406: C5.2 49.13,84.16 R3.1 49.13,91.36 50.72,92.95 53.26,92.95 55.17,91.04 61.52,91.04 62.15,90.41 62.15,63.1 U$7.A14
  Bottom 0.406: S5.1 47.19,28.85 49.45,26.91 62.15,26.91 62.79,27.54 62.79,39.61 U$7.A6 | U$7.A6 U$7.A7 62.79,45.96 62.79,60.72 61.67,61.83 U$7.A14 | U$8.GND 53.9,40.24 59.61,40.24 U$7.A6
  pour Bottom: 45.01,26.59 45.01,99.62 63.1,99.62 63.1,26.59
GND5  (1 unrouted)
  Top 0.406: C6.2 26.98,84.16 R4.1 26.98,91.36 28.57,92.95 31.11,92.95 33.02,91.04 39.37,91.04 40.01,90.41 40.01,63.1 U$9.A14
  Bottom 0.406: S7.1 25.04,28.85 27.3,26.91 40.01,26.91 40.64,27.54 40.64,39.61 U$9.A6 | U$9.A6 U$9.A7 40.64,45.96 40.64,60.72 39.53,61.83 U$9.A14 | U$10.GND 31.75,40.24 37.47,40.24 U$9.A6
  pour Bottom: 22.86,26.59 22.86,99.62 40.96,99.62 40.96,26.59
MREQ
  Top 0.305: U$1.MREQ 63.74,6.35 63.9,6.51 63.9,11.67 66.12,13.89 68.82,13.89 70.09,15.16 73.66,15.16 74.45,14.37 75.8,14.37 77.39,12.78 77.74,12.78 IC741G332.6
MREQ1
  Bottom 0.406: U$2.MREQ 6.11,63.9 8.02,63.9 U$3.B16
MREQ2
  Top 0.305: U$4.MREQ 19.68,6.35 19.84,6.51 19.84,11.67 22.07,13.89 24.77,13.89 26.04,15.16 29.61,15.16 30.4,14.37 31.75,14.37 33.34,12.78 33.69,12.78 IC741G1.6
MREQ3
  Bottom 0.406: U$6.MREQ 72.63,63.74 74.53,63.74 U$5.B16
MREQ4
  Bottom 0.406: U$8.MREQ 50.72,63.74 52.63,63.74 U$7.B16
MREQ5
  Bottom 0.406: U$10.MREQ 28.57,63.74 30.48,63.74 U$9.B16
N$1
  Top 0.406: C2.1 2.72,86.66 R1.2 2.62,89.81 S2.1 S2.2
N$2
  Top 0.305: 78.34,17.3 JP1.2 78.34,14.13 77.87,13.65 77.23,13.65 75.96,14.92 74.69,14.92 73.82,15.8 SST28SF040.1
  Bottom 0.305: JP1.2 80.41,17.78 81.99,16.19 RN1.4
N$3  (via drill 0.5)
  Top 0.305: SST28SF040.30 71.68,11.99 71.68,11.75 v72.55,10.87 | RN1.3 84.22,13.65 85.17,14.61 85.17,21.83 84.45,22.54 81.99,22.54 80.33,24.21 53.1,24.21 SW1.2
  Bottom 0.305: v72.55,10.87 72.55,12.3 76.44,16.19 80.64,16.19 RN1.3
N$4  (via drill 0.5)
  Top 0.305: SW1.4 49.69,19.84 53.5,19.84 57.39,23.73 78.18,23.73 RN1.5 | v75.33,16.67 74.85,16.67 74.45,17.07 SST28SF040.2
  Bottom 0.305: v75.33,16.67 75.33,16.99 77.15,18.81 83.03,18.81 83.11,18.73 RN1.5
N$5  (via drill 0.5)
  Top 0.305: 75.01,18.41 v75.33,18.41 75.25,18.34 SST28SF040.3
  Bottom 0.305: v75.33,18.41 76.2,19.29 81.2,19.29 RN1.6 81.99,21.27 79.53,23.73 57.39,23.73 53.5,19.84 47.15,19.84 SW1.8
N$6  (via drill 0.5)
  Top 0.305: SST28SF040.29 69.91,10.1 71.6,8.41 v74.85,8.41
  Bottom 0.305: v74.85,8.41 74.85,13.34 76.91,15.4 78.9,15.4 RN1.2 84.06,11.11 85.17,12.22 85.17,21.83 84.45,22.54 81.99,22.54 80.33,24.21 55.64,24.21 SW1.1
N$7
  Top 0.305: 34.29,17.3 JP2.2 34.29,14.13 33.81,13.65 33.18,13.65 31.91,14.92 30.64,14.92 29.77,15.8 SST28SF001.1
  Bottom 0.305: JP2.2 36.35,17.78 37.94,16.19 RN2.4
N$8  (via drill 0.5)
  Top 0.305: SST28SF001.30 27.62,11.99 27.62,11.75 v28.5,10.87 | RN2.3 40.16,13.65 41.12,14.61 41.12,21.83 40.4,22.54 37.94,22.54 36.27,24.21 9.05,24.21 SW2.2
  Bottom 0.305: v28.5,10.87 28.5,12.3 32.38,16.19 36.59,16.19 RN2.3
N$9  (via drill 0.5)
  Top 0.305: SW2.4 5.64,19.84 9.45,19.84 13.34,23.73 34.13,23.73 RN2.5 | v31.27,16.67 30.8,16.67 30.4,17.07 SST28SF001.2
  Bottom 0.305: v31.27,16.67 31.27,16.99 33.1,18.81 38.97,18.81 39.05,18.73 RN2.5
N$10  (via drill 0.5)
  Top 0.305: 30.96,18.41 v31.27,18.41 31.19,18.34 SST28SF001.3
  Bottom 0.305: v31.27,18.41 32.15,19.29 37.15,19.29 RN2.6 37.94,21.27 35.48,23.73 13.34,23.73 9.45,19.84 3.1,19.84 SW2.8
N$11  (via drill 0.5)
  Top 0.305: SST28SF001.29 25.86,10.1 27.54,8.41 v30.8,8.41
  Bottom 0.305: v30.8,8.41 30.8,13.34 32.86,15.4 34.85,15.4 RN2.2 40.01,11.11 41.12,12.22 41.12,21.83 40.4,22.54 37.94,22.54 36.27,24.21 11.59,24.21 SW2.1
N$12
  Top 0.406: U$3.A15 14.84,63.1 14.84,61.2 15.32,60.72 17.07,60.72 17.54,60.25 17.54,39.93 16.11,38.5 JP4.1
N$13
  Top 0.406: C4.1 69.24,86.5 R2.2 69.14,89.66 S4.1 S4.2
N$14
  Top 0.406: U$5.A15 81.36,62.94 81.36,61.04 81.84,60.56 83.58,60.56 84.06,60.09 84.06,39.77 82.63,38.34 JP6.1
N$15
  Top 0.406: C5.1 47.33,86.5 R3.2 47.23,89.66 S6.1 S6.2
N$16
  Top 0.406: U$7.A15 59.45,62.94 59.45,61.04 59.93,60.56 61.67,60.56 62.15,60.09 62.15,39.77 60.72,38.34 JP8.1
N$17
  Top 0.406: C6.1 25.18,86.5 R4.2 25.09,89.66 S8.1 S8.2
N$18
  Top 0.406: U$9.A15 37.31,62.94 37.31,61.04 37.78,60.56 39.53,60.56 40.01,60.09 40.01,39.77 38.58,38.34 JP10.1
NMI
  Top 0.406: S2.3 7.1,82.03 4.52,79.45 4.52,59.77 5.48,58.82 8.02,58.82 U$3.B14
  Bottom 0.406: S2.4 S2.3
NMI1
  Top 0.406: S4.3 73.62,81.87 71.04,79.3 71.04,59.61 71.99,58.66 74.53,58.66 U$5.B14
  Bottom 0.406: S4.4 S4.3
NMI2
  Top 0.406: S6.3 51.71,81.87 49.13,79.3 49.13,59.61 50.09,58.66 52.63,58.66 U$7.B14
  Bottom 0.406: S6.4 S6.3
NMI3
  Top 0.406: S8.3 29.57,81.87 26.99,79.3 26.99,59.61 27.94,58.66 30.48,58.66 U$9.B14
  Bottom 0.406: S8.4 S8.3
RD  (via drill 0.5)
  Top 0.305: SST28SF040.24 63.26,12.3 66.12,15.16 68.66,15.16 69.93,16.43 73.98,16.43 74.85,15.56 76.44,15.56 v77.39,14.61
  Bottom 0.305: U$1.RD 84.06,6.67 85.17,7.78 85.17,9.37 84.69,9.84 82.15,9.84 v77.39,14.61
RD1
  Top 0.406: U$3.B18 9.92,72.15 9.29,72.79 9.29,78.5 U$2.RD
RD2  (via drill 0.5)
  Top 0.305: SST28SF001.24 19.21,12.3 22.07,15.16 24.61,15.16 25.88,16.43 29.92,16.43 30.8,15.56 32.38,15.56 v33.34,14.61
  Bottom 0.305: U$4.RD 40.01,6.67 41.12,7.78 41.12,9.37 40.64,9.84 38.1,9.84 v33.34,14.61
RD3
  Top 0.406: U$5.B18 76.44,71.99 75.8,72.63 75.8,78.34 U$6.RD
RD4
  Top 0.406: U$7.B18 54.53,71.99 53.9,72.63 53.9,78.34 U$8.RD
RD5
  Top 0.406: U$9.B18 32.38,71.99 31.75,72.63 31.75,78.34 U$10.RD
RESET  (1 unrouted)
  Top 0.406: U$3.A20 14.84,75.96 14.84,65.48 13.57,64.21 13.57,60.25 14.84,58.98 14.84,41.99 12.62,39.77 6.43,39.77 5.79,39.13 5.79,37.02 S1.4
RESET1  (1 unrouted)
  Top 0.406: U$5.A20 81.36,75.8 81.36,65.33 80.09,64.06 80.09,60.09 81.36,58.82 81.36,41.83 79.14,39.61 72.95,39.61 72.31,38.97 72.31,36.87 S3.4
RESET2  (1 unrouted)
  Top 0.406: U$7.A20 59.45,75.8 59.45,65.33 58.18,64.06 58.18,60.09 59.45,58.82 59.45,41.83 57.23,39.61 51.04,39.61 50.4,38.97 50.4,36.87 S5.4
RESET3  (1 unrouted)
  Top 0.406: U$9.A20 37.31,75.8 37.31,65.33 36.04,64.06 36.04,60.09 37.31,58.82 37.31,41.83 35.08,39.61 28.89,39.61 28.26,38.97 28.26,36.87 S7.4
ROMCS
  Bottom 0.406: U$3.A25 12.46,86.12 9.92,86.12 9.29,85.49 9.29,79.77 U$2.ROMCS 6.27,77.87 4.84,76.44 4.84,70.25 1.03,66.44 1.03,59.29 1.51,58.82 4.05,58.82 6.59,61.36 8.65,61.36 10.56,63.26 12.78,63.26 15.32,60.72 17.07,60.72 17.54,60.25 17.54,48.5 17.07,48.02 15.64,48.02 14.05,46.43 14.05,44.05 12.94,42.94 9.13,42.94 8.49,43.58 6.59,43.58 4.52,41.51 4.52,40.08 | U$3.B4 7.7,40.08 4.52,40.08 | 4.52,40.08 JP3.1
ROMCS1
  Bottom 0.406: U$5.A25 78.98,85.96 76.44,85.96 75.8,85.33 75.8,79.61 U$6.ROMCS 72.79,77.71 71.36,76.28 71.36,70.09 67.55,66.28 67.55,59.13 68.02,58.66 70.56,58.66 73.1,61.2 75.17,61.2 77.07,63.1 79.3,63.1 81.84,60.56 83.58,60.56 84.06,60.09 84.06,48.34 83.58,47.86 82.15,47.86 80.57,46.28 80.57,43.89 79.45,42.78 75.64,42.78 75.01,43.42 73.1,43.42 71.04,41.35 71.04,39.93 | U$5.B4 74.22,39.93 71.04,39.93 | 71.04,39.93 JP5.1
ROMCS2
  Bottom 0.406: U$7.A25 57.07,85.96 54.53,85.96 53.9,85.33 53.9,79.61 U$8.ROMCS 50.88,77.71 49.45,76.28 49.45,70.09 45.64,66.28 45.64,59.13 46.12,58.66 48.66,58.66 51.2,61.2 53.26,61.2 55.17,63.1 57.39,63.1 59.93,60.56 61.67,60.56 62.15,60.09 62.15,48.34 61.67,47.86 60.25,47.86 58.66,46.28 58.66,43.89 57.55,42.78 53.74,42.78 53.1,43.42 51.2,43.42 49.13,41.35 49.13,39.93 | U$7.B4 52.31,39.93 49.13,39.93 | 49.13,39.93 JP7.1
ROMCS3
  Bottom 0.406: U$9.A25 34.92,85.96 32.38,85.96 31.75,85.33 31.75,79.61 U$10.ROMCS 28.73,77.71 27.3,76.28 27.3,70.09 23.5,66.28 23.5,59.13 23.97,58.66 26.51,58.66 29.05,61.2 31.11,61.2 33.02,63.1 35.24,63.1 37.78,60.56 39.53,60.56 40.01,60.09 40.01,48.34 39.53,47.86 38.1,47.86 36.51,46.28 36.51,43.89 35.4,42.78 31.59,42.78 30.96,43.42 29.05,43.42 26.99,41.35 26.99,39.93 | U$9.B4 30.16,39.93 26.99,39.93 | 26.99,39.93 JP9.1
VCC  (via drill 0.6)
  Top 0.305: IC741G332.5 v78.74,11.43 77.71,11.43 76.28,12.86 75.54,12.86 C1.1 75.11,12.91 73.5,14.53 SST28SF040.32 | U$1.ROMCS 81.52,6.91 RN1.1
  Bottom 0.305: v78.74,11.43 81.2,8.57 RN1.1 81.52,6.91 U$1.ROMCS
VCC1
  Top 0.406: U$3.A3 18.18,35.96 18.18,98.19 16.91,99.46 1.67,99.46 0.4,98.19 0.4,78.5 1.03,77.87 U$2.+5V
VCC2  (via drill 0.6)
  Top 0.305: IC741G1.5 v34.69,11.43 33.66,11.43 32.23,12.86 31.49,12.86 C3.1 31.06,12.91 29.45,14.53 SST28SF001.32 | U$4.ROMCS 37.47,6.91 RN2.1
  Bottom 0.305: v34.69,11.43 37.15,8.57 RN2.1 37.47,6.91 U$4.ROMCS
VCC3
  Top 0.406: U$5.A3 84.69,35.8 84.69,98.03 83.42,99.3 68.18,99.3 66.91,98.03 66.91,78.34 67.55,77.71 U$6.+5V
VCC4
  Top 0.406: U$7.A3 62.79,35.8 62.79,98.03 61.52,99.3 46.28,99.3 45.01,98.03 45.01,78.34 45.64,77.71 U$8.+5V
VCC5
  Top 0.406: U$9.A3 40.64,35.8 40.64,98.03 39.37,99.3 24.13,99.3 22.86,98.03 22.86,78.34 23.5,77.71 U$10.+5V
WR
  Top 0.305: U$1.WR 84.06,6.67 85.17,7.78 85.17,9.37 84.69,9.84 81.99,9.84 80.57,8.41 77.07,8.41 75.64,9.84 75.17,9.84 74.3,10.72 74.3,11.43 72.47,13.26 SST28SF040.31
WR1
  Top 0.406: U$3.B19 12.62,76.12 12.62,87.87 11.83,88.66 10.56,88.66 9.92,89.3 9.92,90.57 8.02,92.47 6.75,92.47 5.48,91.2 5.48,88.66 6.11,88.03 6.11,82.31 4.21,80.41 U$2.WR
WR2
  Top 0.305: U$4.WR 40.01,6.67 41.12,7.78 41.12,9.37 40.64,9.84 37.94,9.84 36.51,8.41 33.02,8.41 31.59,9.84 31.11,9.84 30.24,10.72 30.24,11.43 28.42,13.26 SST28SF001.31
WR3
  Top 0.406: U$5.B19 79.14,75.96 79.14,87.71 78.34,88.5 77.07,88.5 76.44,89.14 76.44,90.41 74.53,92.31 73.26,92.31 71.99,91.04 71.99,88.5 72.63,87.87 72.63,82.15 70.72,80.25 U$6.WR
WR4
  Top 0.406: U$7.B19 57.23,75.96 57.23,87.71 56.44,88.5 55.17,88.5 54.53,89.14 54.53,90.41 52.63,92.31 51.36,92.31 50.09,91.04 50.09,88.5 50.72,87.87 50.72,82.15 48.82,80.25 U$8.WR
WR5
  Top 0.406: U$9.B19 35.08,75.96 35.08,87.71 34.29,88.5 33.02,88.5 32.38,89.14 32.38,90.41 30.48,92.31 29.21,92.31 27.94,91.04 27.94,88.5 28.57,87.87 28.57,82.15 26.67,80.25 U$10.WR

## Text on the board
bPlace: Interface II jul2015 | Interface II jul2015 | Interface II jul2015 | Interface II jul2015 | AntonioVillena | AntonioVillena | AntonioVillena | AntonioVillena | Cartridge for IF2 | Cartridge for IF2 | AntonioVillena jul2015 | AntonioVillena jul2015